# EAGLE board nicoduino (EAGLE 6.5.0)
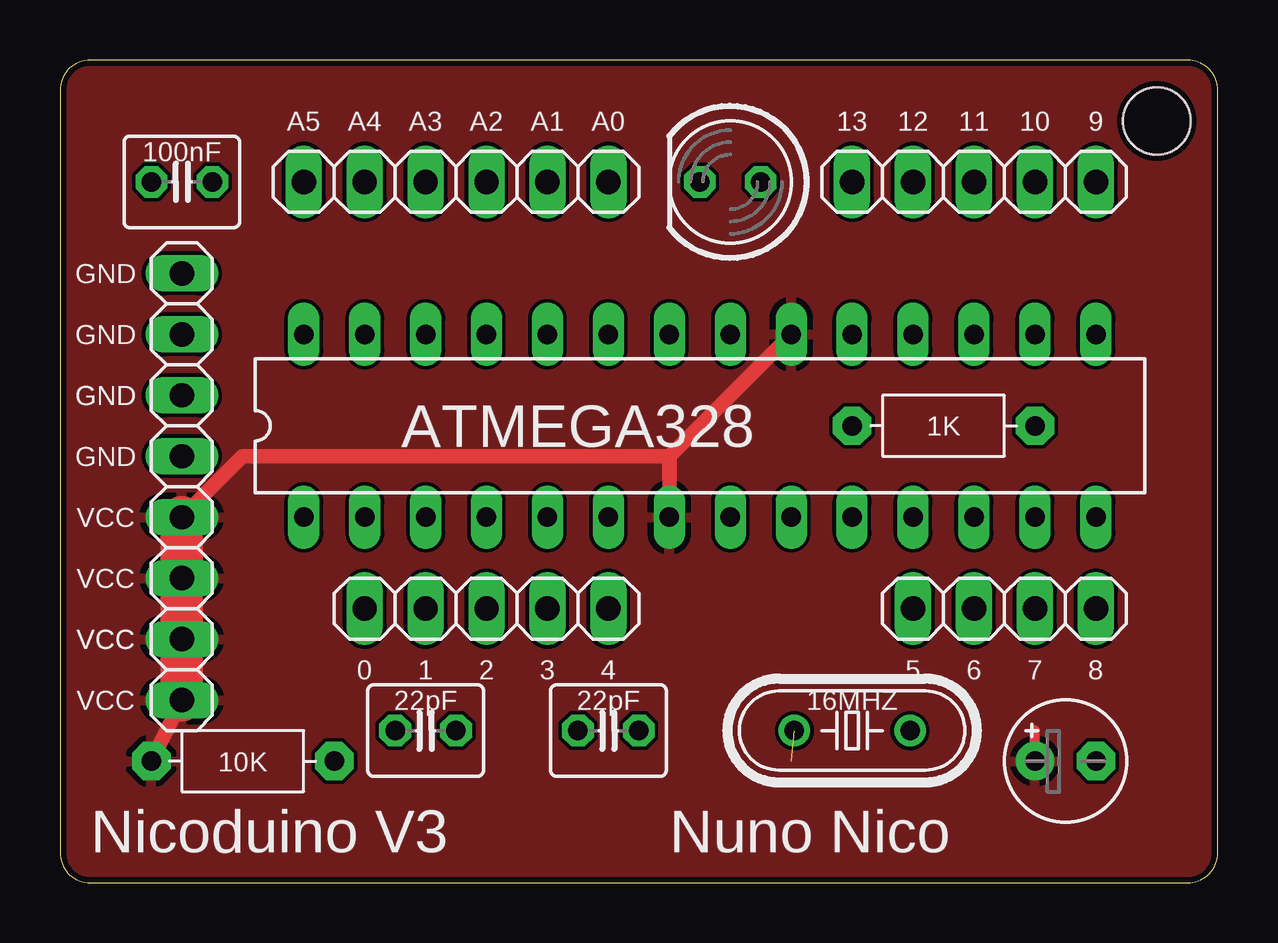
[diagram p0: board, top side]
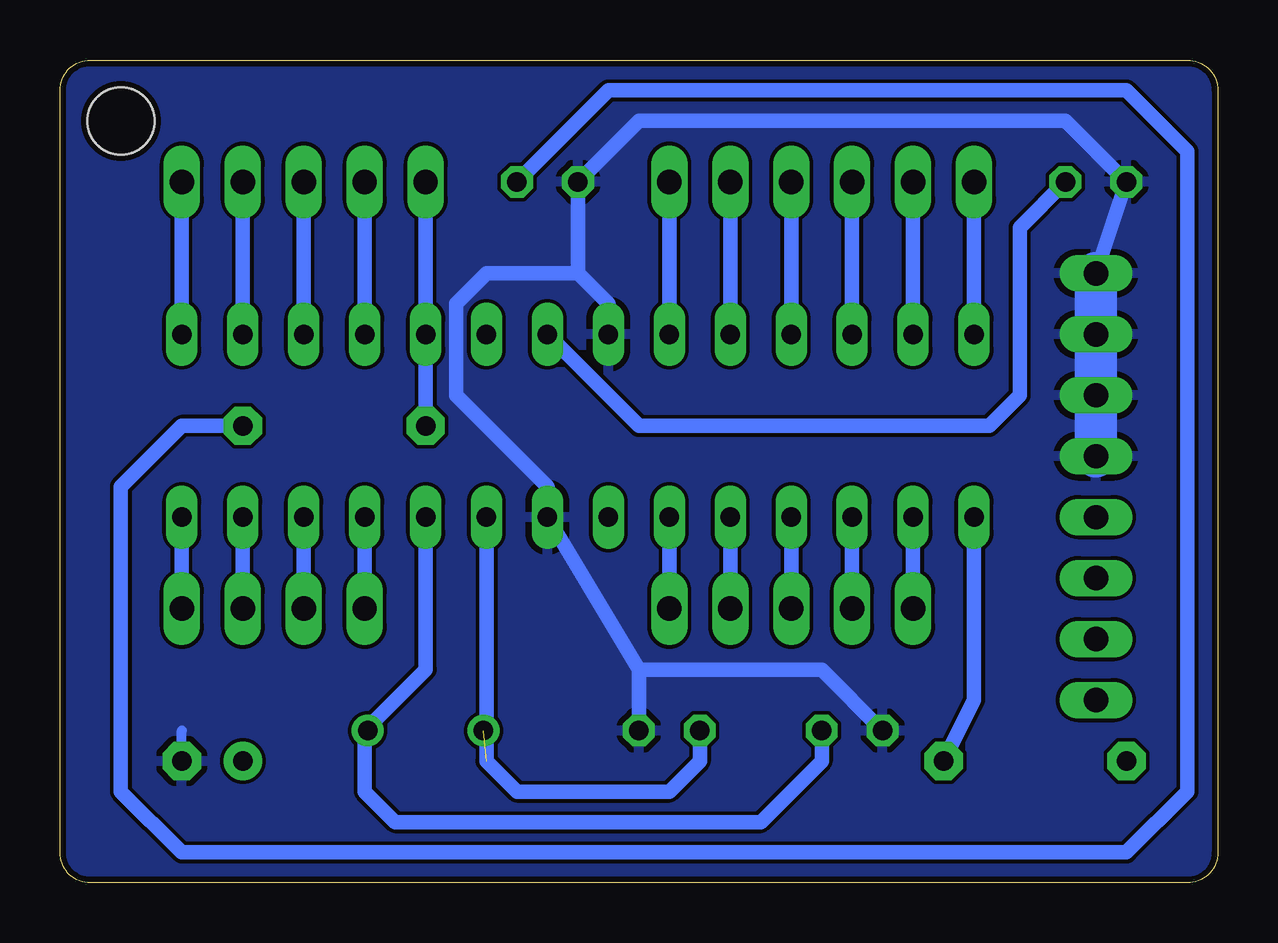
[diagram p1: board, bottom side, seen from below]

Size 48.26 x 34.29 mm. Coordinates in mm from the lower left corner, seen from the top.
Outline: 1.27,0 46.99,0 arc90 48.26,1.27 48.26,33.02 arc90 46.99,34.29 1.27,34.29 arc90 0,33.02 0,1.27 arc90 1.27,0
Copper layers (1*16): Top 0.035mm / dielectric 1.5mm / Bottom 0.035mm
Design rules "SeeedStudio_2layer_DRU_no_angle_20140221": minimum track width 6mil, minimum drill 12mil, track to track 6mil, track to pad 6mil, pad to pad 6mil, via to via 6mil, smd to smd 0mil, copper to edge 10mil, drill to drill 10mil, minimum pad ring 10mil, minimum via ring 6mil, stop-mask expansion 2mil, vias tented up to drill 100mil, thermal gap 10mil
Holes 2.8 mm at 45.72,31.75

## Footprints (pad centres in the part's own frame; a part is rotated, then mirrored left to right if it is on the bottom)
R-7,5 = drill 0.813 pad 1.6 octagon: 1 -3.81,0; 2 3.81,0
C025-040X050 = drill 0.813 octagon: 1 -1.27,0; 2 1.27,0
1X04 = drill 1.016 long: 1 -3.81,0; 2 -1.27,0; 3 1.27,0; 4 3.81,0
1X06 = drill 1.016 long: 1 -6.35,0; 2 -3.81,0; 3 -1.27,0; 4 1.27,0; 5 3.81,0; 6 6.35,0
1X05 = drill 1.016 long: 1 -5.08,0; 2 -2.54,0; 3 0,0; 4 2.54,0; 5 5.08,0
LED5MM = drill 0.813 octagon: A -1.27,0; K 1.27,0
E2,5-5 = drill 0.813 pad 1.6: + -1.27,0 | drill 0.813 pad 1.6 octagon: - 1.27,0
DIL28-3 = drill 0.813 long: 1 -16.51,-3.81; 2 -13.97,-3.81; 3 -11.43,-3.81; 4 -8.89,-3.81; 5 -6.35,-3.81; 6 -3.81,-3.81; 7 -1.27,-3.81; 8 1.27,-3.81; 9 3.81,-3.81; 10 6.35,-3.81; 11 8.89,-3.81; 12 11.43,-3.81; 13 13.97,-3.81; 14 16.51,-3.81; 15 16.51,3.81; 16 13.97,3.81; 17 11.43,3.81; 18 8.89,3.81; 19 6.35,3.81; 20 3.81,3.81; 21 1.27,3.81; 22 -1.27,3.81; 23 -3.81,3.81; 24 -6.35,3.81; 25 -8.89,3.81; 26 -11.43,3.81; 27 -13.97,3.81; 28 -16.51,3.81
HC49/S = drill 0.813: 1 -2.413,0; 2 2.413,0

## Placement (x,y rotation side)
10K  [R-7,5]  7.62,5.08 0 top
C1  [C025-040X050]  5.08,29.21 180 top
C3  [C025-040X050]  15.24,6.35 0 top
C4  [C025-040X050]  22.86,6.35 0 top
E$1  [1X04]  39.37,11.43 0 top
E$2  GND  [1X04]  5.08,21.59 90 top
E$3  VCC  [1X04]  5.08,11.43 90 top
E$4  [1X06]  16.51,29.21 0 top
E$5  [1X05]  38.1,29.21 0 top
E$6  [1X05]  17.78,11.43 0 top
E$7  [LED5MM]  27.94,29.21 180 top
E$8  [R-7,5]  36.83,19.05 0 top
E$9  [E2,5-5]  41.91,5.08 0 top
IC1  ATMEGA328  [DIL28-3]  26.67,19.05 0 top
Q1  [HC49/S]  33.02,6.35 0 top

## Library data of the parts
10K E$8 = discrete
C1 C3 C4 E$9 = rcl
E$1-E$6 = pinhead
E$7 = led
IC1 = atmel; OC_FARNELL: unknown; OC_NEWARK: unknown
Q1 = crystal; OC_FARNELL: 1667008; OC_NEWARK: unknown

## Nets
CRIS_1: C4.1 IC1.9 Q1.1
GND: C1.2 C3.1 C4.2 E$2.1 E$2.2 E$2.3 E$2.4 E$7.K E$9.- IC1.8 IC1.22
S$3: E$5.2 IC1.18
S$4: E$5.3 IC1.17
S$5: E$5.4 IC1.16
S$6: E$5.1 E$8.1 IC1.19
S$7: E$4.1 IC1.28
S$8: E$4.2 IC1.27
S$9: E$4.3 IC1.26
S$10: E$4.4 IC1.25
S$11: E$4.5 IC1.24
S$12: E$4.6 IC1.23
S$13: E$5.5 IC1.15
S$14: E$6.1 IC1.2
S$15: E$6.2 IC1.3
S$16: E$6.3 IC1.4
S$17: E$6.4 IC1.5
S$18: E$6.5 IC1.6
S$19: E$1.1 IC1.11
S$20: E$1.2 IC1.12
S$21: E$1.3 IC1.13
S$22: E$1.4 IC1.14
S$23: 10K.2 IC1.1
S$24: C1.1 IC1.21
S$28: C3.2 IC1.10
S$29: E$7.A E$8.2
VCC: 10K.1 E$3.1 E$3.2 E$3.3 E$3.4 E$9.+ IC1.7 IC1.20

## Tracks (layer width: path | path; a pad name or v marks a point on that pad's centre or on a via)
CRIS_1  (1 unrouted)
  Bottom 0.61: C4.1 21.59,5.08 22.86,3.81 29.21,3.81 30.48,5.08 IC1.9
GND
  Bottom 0.406: E$9.- 43.18,6.35
  Bottom 0.61: 26.67,25.4 25.4,24.13 IC1.22 | 26.67,25.4 E$7.K 24.13,31.75 6.35,31.75 C1.2 E$2.4 | 24.13,8.89 IC1.8 27.94,16.51 31.75,20.32 31.75,24.13 30.48,25.4 26.67,25.4 | C4.2 24.13,8.89 | 24.13,8.89 16.51,8.89 C3.1
  Bottom 1.778: E$2.4 E$2.3 E$2.2 E$2.1
  pour Bottom: 0,1.27 arc90 1.27,0 46.99,0 arc90 48.26,1.27 48.26,33.02 arc90 46.99,34.29 1.27,34.29 arc90 0,33.02
S$3
  Bottom 0.61: E$5.2 IC1.18
S$4
  Bottom 0.61: IC1.17 E$5.3
S$5
  Bottom 0.61: E$5.4 IC1.16
S$6
  Bottom 0.61: E$5.1 IC1.19 E$8.1
S$7
  Bottom 0.61: IC1.28 E$4.1
S$8
  Bottom 0.61: IC1.27 E$4.2
S$9
  Bottom 0.61: E$4.3 IC1.26
S$10
  Bottom 0.61: IC1.25 E$4.4
S$11
  Bottom 0.61: E$4.5 IC1.24
S$12
  Bottom 0.61: IC1.23 E$4.6
S$13
  Bottom 0.61: IC1.15 E$5.5
S$14
  Bottom 0.61: IC1.2 E$6.1
S$15
  Bottom 0.61: E$6.2 IC1.3
S$16
  Bottom 0.61: IC1.4 E$6.3
S$17
  Bottom 0.61: E$6.4 IC1.5
S$18
  Bottom 0.61: IC1.6 E$6.5
S$19
  Bottom 0.61: IC1.11 E$1.1
S$20
  Bottom 0.61: IC1.12 E$1.2
S$21
  Bottom 0.61: E$1.3 IC1.13
S$22
  Bottom 0.61: E$1.4 IC1.14
S$23
  Bottom 0.61: IC1.1 10.16,7.62 10K.2
S$24
  Bottom 0.61: IC1.21 24.13,19.05 9.53,19.05 8.26,20.32 8.26,27.3 C1.1
S$28
  Bottom 0.61: C3.2 16.51,5.08 19.05,2.54 34.29,2.54 35.56,3.81 35.56,6.35 33.02,8.89 IC1.10
S$29
  Bottom 0.61: E$7.A 25.4,33.02 3.81,33.02 1.27,30.48 1.27,3.81 3.81,1.27 43.18,1.27 45.72,3.81 45.72,16.51 43.18,19.05 E$8.2
VCC
  Top 0.406: E$9.+ 40.64,6.35
  Top 0.61: 25.4,17.78 IC1.7 | IC1.20 25.4,17.78 | 25.4,17.78 7.62,17.78 E$3.4 | E$3.1 10K.1
  Top 1.778: E$3.4 E$3.3 E$3.2 E$3.1
  pour Top: 1.27,34.29 arc90 0,33.02 0,1.27 arc90 1.27,0 46.99,0 arc90 48.26,1.27 48.26,33.02 arc90 46.99,34.29

## Text on the board
tPlace: A5 | A4 | A3 | A2 | A1 | A0 | 13 | 12 | 11 | 10 | 9 | 100nF | GND | GND | GND | GND | ATMEGA328 | 1K | GND | VCC | VCC | VCC | VCC | 0 | 1 | 2 | 3 | 4 | 5 | 6 | 7 | 8 | VCC | 22pF | 22pF | 16MHZ | Nicoduino V3 | Nuno Nico